# Altium PCB PCB_2-way_Traffic.PcbDoc
Units mil, origin at the board's own origin, x right, y up, seen from the top; angles counter-clockwise.
Board outline 2755.91 x 2244.09 mil, 2 copper layers (Top Layer, Bottom Layer); 17 components, 25 nets, 151 pads, 0 vias.
Unrouted connection lines stored in the file: 8.
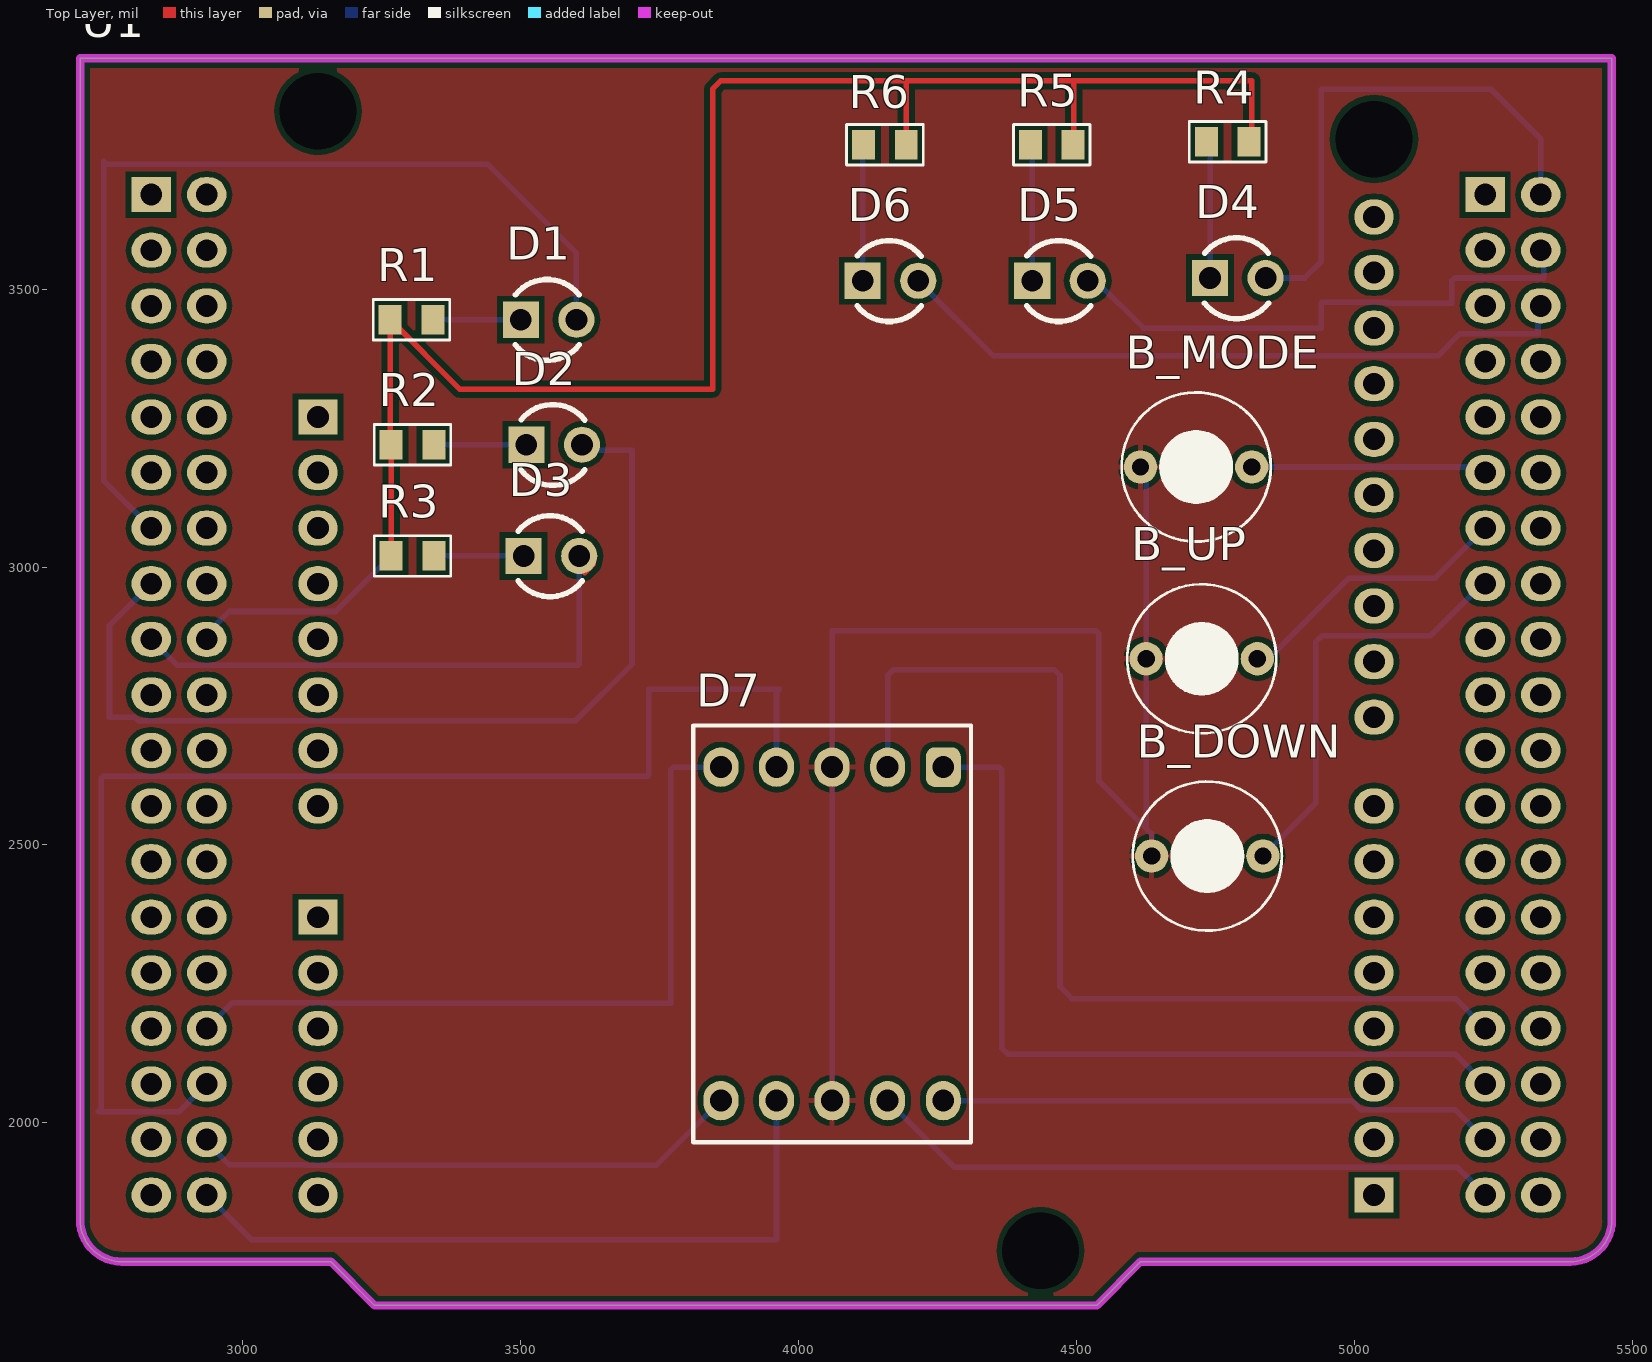
[diagram p0: Top Layer view]
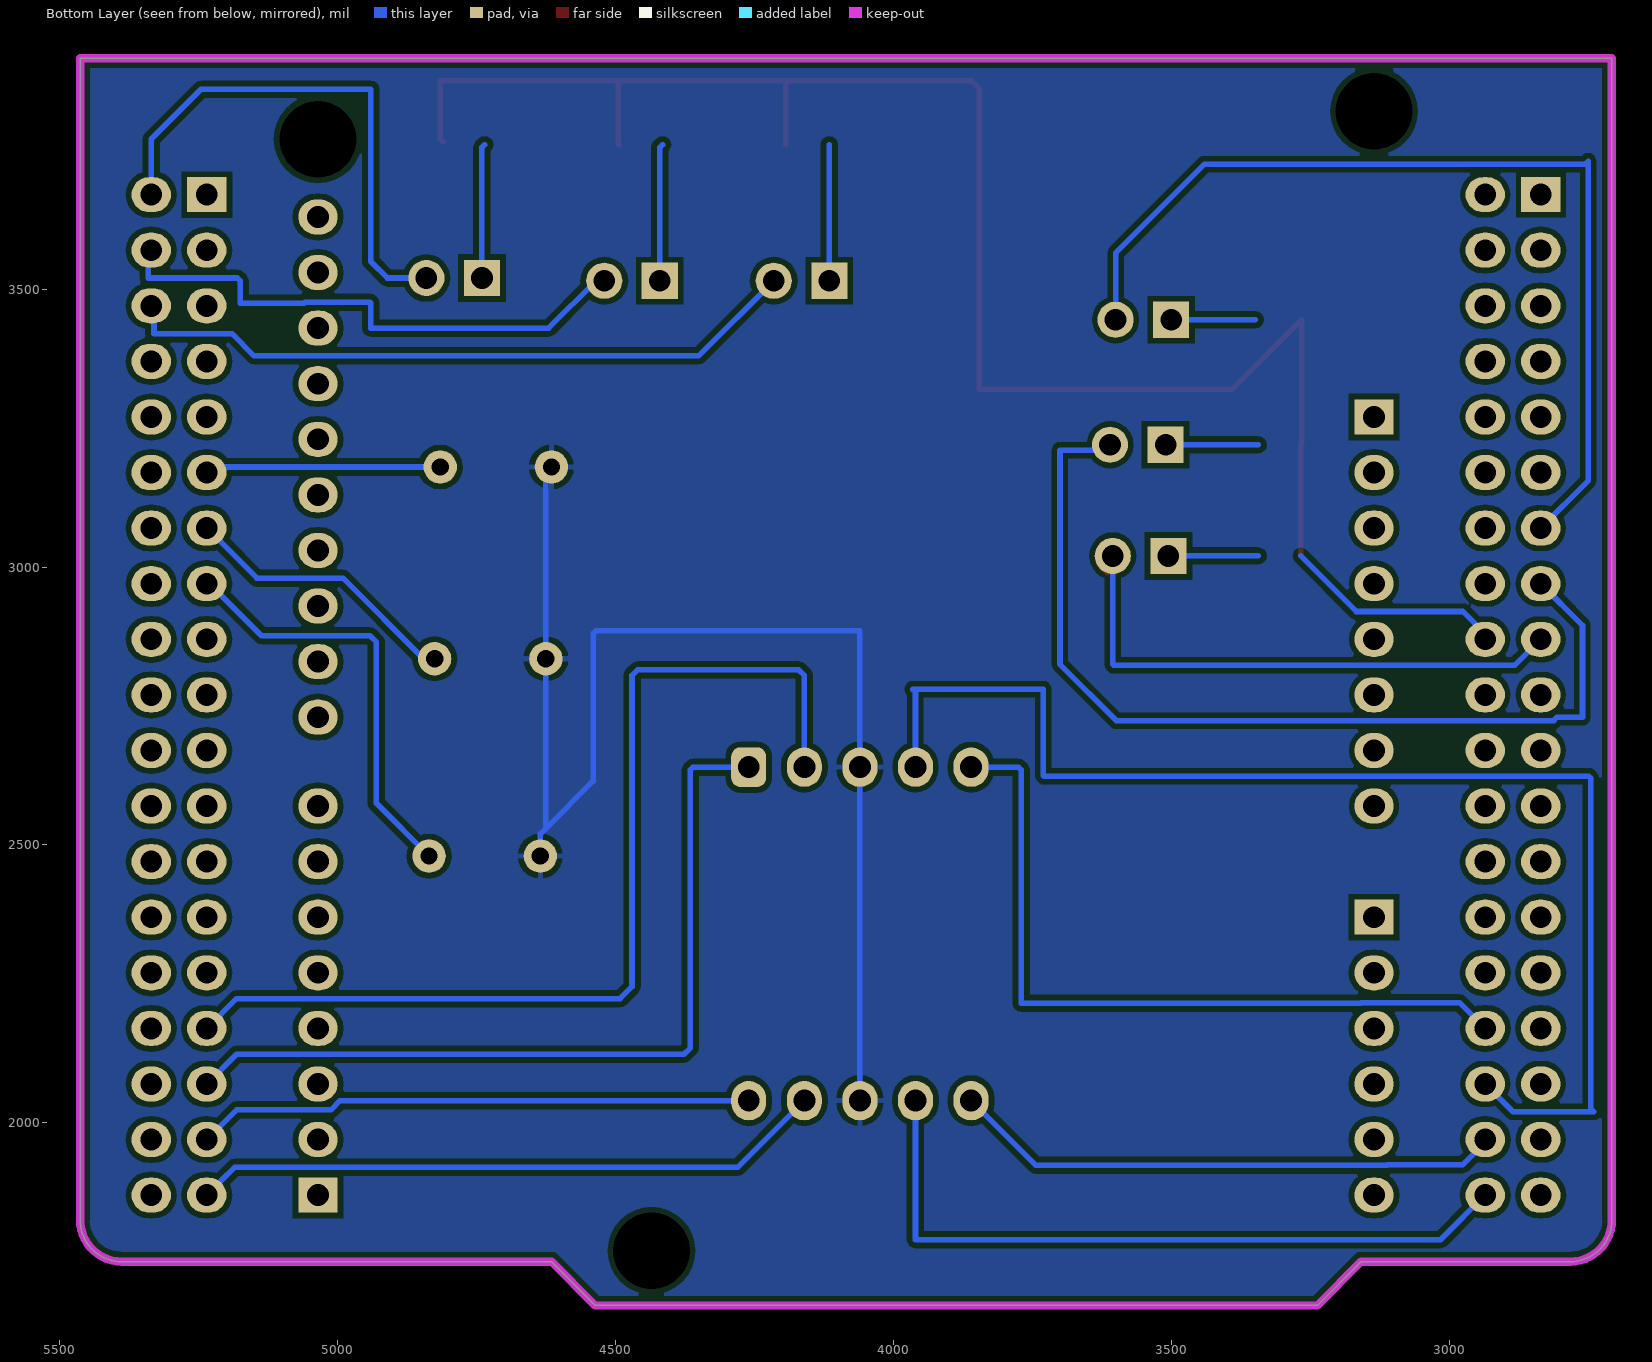
[diagram p1: Bottom Layer view, seen from below]
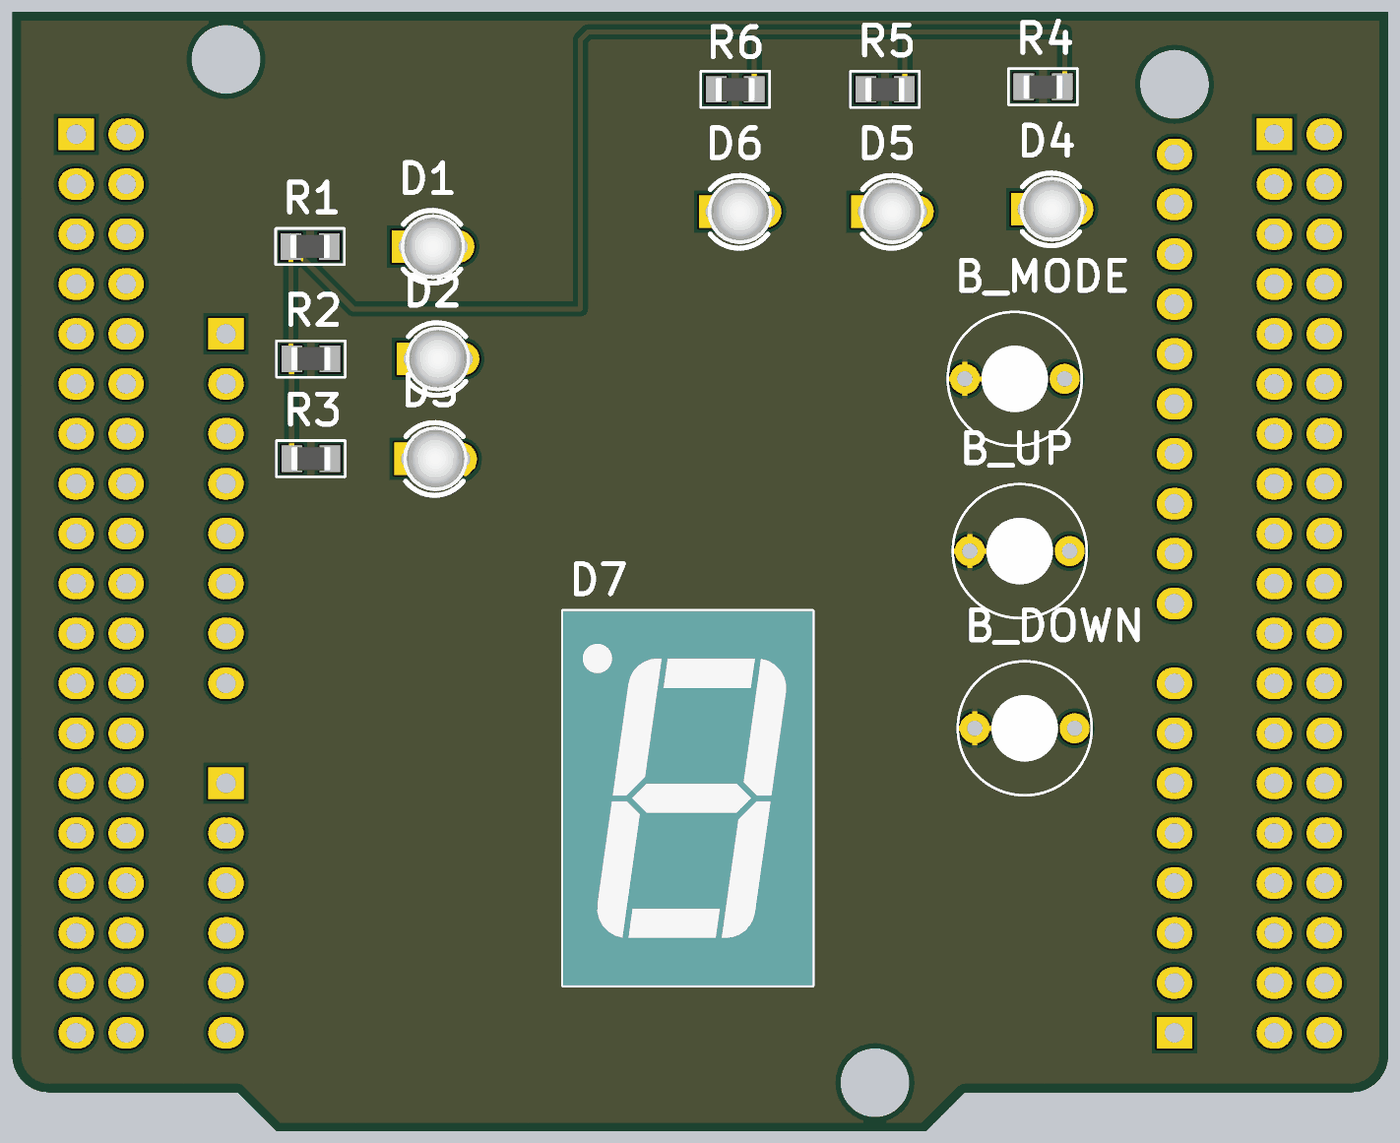
[diagram p2: 3D render of the assembled board from above, using the file's embedded part models]

## Layer stack, top to bottom
Top Solder: solder mask 0.4, Solder Resist, Dk 3.5
Top Layer: signal copper 1.4
Dielectric 1: dielectric 12.6, FR-4, Dk 4.8
Bottom Layer: signal copper 1.4
Bottom Solder: solder mask 0.4, Solder Resist, Dk 3.5

## Board outline
2707.05,1825.32 ccw(c2782.05,1825.32) 2782.05,1750.32 3158.23,1750.32 3236.97,1671.57 4536.18,1671.57 4614.92,1750.32 5387.95,1750.32 ccw(c5387.95,1825.32) 5462.95,1825.32 5462.95,3915.67 2707.05,3915.67

## Design rules (kind name [scope] priority, off if disabled: settings)
Clearance [All] p1: gap=10 ignorepadtopadclearanceinfootprint=FALSE
PolygonConnect [All] p1: connectstyle=Relief reliefconductorwidth=10 reliefentries=4 polygonreliefangle="90 Angle" airgapwidth=10
RoomDefinition SCH_2-way_Traffic [InComponentClass('SCH_2-way_Traffic')] p1: confinementstyle=ConfineIn formatcopy=TRUE lockcomponents=FALSE outline 7045,1060 13045,1060 13045,3945 7045,3945
RoutingVias [All] p1: holewidth=28 width=50 viastyle="Through Hole" minholewidth=28 minwidth=50 maxholewidth=28 maxwidth=50
SolderMaskExpansion [All] p1: expansion=4
Width [All] p1: maxlimit=10 minlimit=10 preferedwidth=10
30 further rules are at their usual default settings.

## Components (designator, comment, footprint, x,y, rotation, side; value= is the part's Value field where it differs from the comment)
B_DOWN "Button" SW/2/DIP 4735,2480 r180 top
B_MODE "Button" SW/2/DIP 4715,3180 r180 top
B_UP "Button" SW/2/DIP 4725,2835 r180 top
D1 "Led" "LED 3MM - red" 3550,3445 r0 top
D2 "Led" "LED 3MM - yellow" 3560,3220 r0 top
D3 "Led" "LED 3MM - green" 3555,3020 r0 top
D4 "Led" "LED 3MM - red" 4790,3520 r0 top
D5 "Led" "LED 3MM - yellow" 4470,3515 r0 top
D6 "Led" "LED 3MM - green" 4165,3515 r0 top
D7 "SM420563N" LED/7SEG/0.56 4260,2640 r180 top
R1 "R" "R 0805" 3303.39,3445 r180 top
R2 "R" "R 0805" 3305,3220 r180 top
R3 "R" "R 0805" 3305,3020 r180 top
R4 "R" "R 0805" 4771.61,3765 r0 top
R5 "R" "R 0805" 4455,3760 r0 top
R6 "R" "R 0805" 4155,3760 r0 top
U1 "NUCLEO-F103RB" NUCLEO 2707.05,1750.32 r0 top locked

## Footprints (in the part's own frame and the unit in brackets; to place one, negate y for a bottom-side part, rotate by r counter-clockwise, add the part's x,y. Pads: shape width x height; smd on the part's side, far side on the other; paste and mask are expansions set on the pad)
"LED 3MM - green" [mil]
  rect 65x65 hole 39: 1(-50,0)
  round 65 hole 39: 2(50,0)
  silkscreen extent -60,-73 55,72, body extent -66,-65 64,65, height 207
"LED 3MM - red" [mil]
  rect 65x65 hole 39: 1(-50,0)
  round 65 hole 39: 2(50,0)
  silkscreen extent -60,-73 55,72, body extent -66,-65 64,65, height 207
"LED 3MM - yellow" [mil]
  rect 65x65 hole 39: 1(-50,0)
  round 65 hole 39: 2(50,0)
  silkscreen extent -60,-73 55,72, body extent -66,-65 64,65, height 207
LED/7SEG/0.56 [mm]
  rrect50% 1.6x1.8 hole 1: 1(0,0)
  oval 1.6x1.8 hole 1: 2(2.54,0) 3(5.08,0) 4(7.62,0) 5(10.16,0) 6(10.16,15.24) 7(7.62,15.24) 8(5.08,15.24) 9(2.54,15.24) 10(0,15.24)
  silkscreen extent -1.27,-1.91 11.43,17.14, body extent -1.27,-1.91 11.43,17.14, height 8.03
NUCLEO [mm]
  oval 1.8x1.6 hole 1: A5_1(59.13,24.88) A5_2(59.13,27.42) A5_3(59.13,29.96) A5_4(59.13,32.5) A5_5(59.13,35.04) A5_6(59.13,37.58) A5_7(59.13,40.12) A5_8(59.13,42.66) A5_9(59.13,45.2) A5_10(59.13,47.74) A6_2(10.87,36.06) A6_3(10.87,33.52) A6_4(10.87,30.98) A6_5(10.87,28.44) A6_6(10.87,25.9) A6_7(10.87,23.36) A6_8(10.87,20.82) A8_2(10.87,13.2) A8_3(10.87,10.66) A8_4(10.87,8.12) A8_5(10.87,5.58) A8_6(10.87,3.04) A9_2(59.13,5.58) A9_3(59.13,8.12) A9_4(59.13,10.66) A9_5(59.13,13.2) A9_6(59.13,15.74) A9_7(59.13,18.28) A9_8(59.13,20.82) M7_2(5.79,48.76) M7_3(3.25,46.22) M7_4(5.79,46.22) M7_5(3.25,43.68) M7_6(5.79,43.68) M7_7(3.25,41.14) M7_8(5.79,41.14) M7_9(3.25,38.6) M7_10(5.79,38.6) M7_11(3.25,36.06) M7_12(5.79,36.06) M7_13(3.25,33.52) M7_14(5.79,33.52) M7_15(3.25,30.98) M7_16(5.79,30.98) M7_17(3.25,28.44) M7_18(5.79,28.44) M7_19(3.25,25.9) M7_20(5.79,25.9) M7_21(3.25,23.36) M7_22(5.79,23.36) M7_23(3.25,20.82) M7_24(5.79,20.82) M7_25(3.25,18.28) M7_26(5.79,18.28) M7_27(3.25,15.74) M7_28(5.79,15.74) M7_29(3.25,13.2) M7_30(5.79,13.2) M7_31(3.25,10.66) M7_32(5.79,10.66) M7_33(3.25,8.12) M7_34(5.79,8.12) M7_35(3.25,5.58) M7_36(5.79,5.58) M7_37(3.25,3.04) M7_38(5.79,3.04) M10_2(66.75,48.76) M10_3(64.21,46.22) M10_4(66.75,46.22) M10_5(64.21,43.68) M10_6(66.75,43.68) M10_7(64.21,41.14) M10_8(66.75,41.14) M10_9(64.21,38.6) M10_10(66.75,38.6) M10_11(64.21,36.06) M10_12(66.75,36.06) M10_13(64.21,33.52) M10_14(66.75,33.52) M10_15(64.21,30.98) M10_16(66.75,30.98) M10_17(64.21,28.44) M10_18(66.75,28.44) M10_19(64.21,25.9) M10_20(66.75,25.9) M10_21(64.21,23.36) M10_22(66.75,23.36) M10_23(64.21,20.82) M10_24(66.75,20.82) M10_25(64.21,18.28) M10_26(66.75,18.28) M10_27(64.21,15.74) M10_28(66.75,15.74) M10_29(64.21,13.2) M10_30(66.75,13.2) M10_31(64.21,10.66) M10_32(66.75,10.66) M10_33(64.21,8.12) M10_34(66.75,8.12) M10_35(64.21,5.58) M10_36(66.75,5.58) M10_37(64.21,3.04) M10_38(66.75,3.04)
  rect 1.8x1.6 hole 1: A6_1(10.87,38.6) A8_1(10.87,15.74) A9_1(59.13,3.04) M7_1(3.25,48.76) M10_1(64.21,48.76)
  round 0 hole 3.5 unplated: HOLD(10.87,52.57) HOLD(43.89,0.5) HOLD(59.13,51.3)
  Keep-Out Layer lines w0.381: 0,1.905 ccw(c1.905,1.905) 1.905,0 11.46,0 13.46,-2 46.46,-2 48.46,0 68.095,0 ccw(c68.095,1.905) 70,1.905 70,55 0,55 0,1.905
"R 0805" [mm] "Chip Resistor, 2-Leads, Body 2.0x1.3mm, IPC Medium Density"
  rect 1.05x1.35 smd: 1(-0.975,0) 2(0.975,0)
  silkscreen extent -1.75,-0.92 1.75,0.92, body extent -1,-0.61 1,0.59, height 0.5
SW/2/DIP [mil]
  round 60 / inner round 62 / far side round 60 hole 31: 1(-100,0) 2(100,0)
  silkscreen extent -134,-134 134,134, body extent -134,-134 135,135, height 150

## Part data
B_DOWN B_MODE B_UP: library part "SW SPST", "Tact switch 2 pin"
D1 D2 D3 D4 D5 D6: "Typical LED"
D7: library part "LED 7-SEG SM420563N", "SM420563N, Common-Cathode, LED 7-seg, RED, 0.56\","
R1 R2 R3 R4 R5 R6: library part Resistor, "Resistor"
U1: "STM32F103RB, mbed-Enabled Development Nucleo-64 STM32F1 ARM® Cortex®-M3 MCU 32-Bit Embedded Evaluation Board", Manufacturer=STMicroelectronics, BRAND=STMicroelectronics, Manufacturer Product Number=NUCLEO-F103RB, PART NO=NUCLEO-F103RB, STOCK CODE=497-14362-ND, SUPPLIER=digi-key, TYPE="EVAL BRD"

## Nets (pads, with @x,y where several pads share a name; then routed paths per layer and width w, separated by ;. In a path a pad name is that pad's centre, name@x,y a point inside that pad or via, vN(x,y) a via of type N, cw(c..) or ccw(c..) an arc to the next point about the centre after c; other vN are vias at no path point)
+5: R1.2 R2.2 R3.2 R4.2 R5.2 R6.2 U1.M7_18 | length 3317.4
  Top Layer w10: U1.M7_18 U1.M7_18@2935,2880 ; R3.2 R2.2 3265,3221.61 R1.2 3390,3320 3845,3320 3845,3860 3860,3875 4190,3875 ; R6.2 4193.39,3871.61 4190,3875 ; R5.2 4495,3761.61 4495,3875 ; R4.2 4815,3770 4815,3875 4495,3875 ; 4190,3875 4495,3875
  Bottom Layer w10: U1.M7_18@2935,2880 2975,2920 3166.61,2920 3266.61,3020
GND: B_DOWN.2 B_MODE.2 B_UP.2 D7.3 D7.8 | length 2420.6
  Bottom Layer w10: D7.8 D7.3 4060,2885 4535,2885 4540,2880 4540,2615 4625,2530 ; B_MODE.2 4625,3170 B_UP.2 4625,2530 ; B_DOWN.2 4635,2520 4625,2530
LED_GREEN: D3.2 U1.M7_17 | length 984.9
  Bottom Layer w10: U1.M7_17 2881.5,2823.5 3603.5,2823.5 3605,2825 D3.2
LED_GREEN1: D6.2 U1.M10_6 | length 1239.6
  Bottom Layer w10: D6.2 4350,3380 5150,3380 5190,3420 5330,3420 5330,3465 U1.M10_6
LED_RED: D1.2 U1.M7_13 | length 1728.6
  Bottom Layer w10: U1.M7_13 2750,3155 2750,3730 2755,3725 3440,3725 3600,3565 D1.2@3600,3450
LED_RED1: D4.2 U1.M10_2 | length 954.7
  Bottom Layer w10: D4.2 4910,3520 4940,3550 4940,3860 5245,3860 5335,3770 U1.M10_2
LED_YELLOW: D2.2 U1.M7_15 | length 1740
  Bottom Layer w10: U1.M7_15 2760,2895 2760,2729.84 2805.47,2729.84 2811.8,2723.5 3598.5,2723.5 3700,2825 3700,3210 3615,3210 D2.2@3605,3220
LED_YELLOW1: D5.2 U1.M10_4 | length 995.5
  Bottom Layer w10: D5.2 4535,3515 4620,3430 4940,3430 4940,3475 4941.34,3476.34 5058.2,3476.34 5059.53,3475 5175,3475 5175,3515 5180,3520 5340,3520 5340,3565 U1.M10_4
NetD1_1: D1.1 R1.1 | length 151.6
  Bottom Layer w10: 3348.39,3445 D1.1
NetD2_1: D2.1 R2.1 | length 166.6
  Bottom Layer w10: 3343.39,3220 D2.1
NetD3_1: D3.1 R3.1 | length 182.8
  Top Layer w10: 3615,2990 3630,3005
  Bottom Layer w10: 3343.39,3020 D3.1
NetD4_1: D4.1 R4.1 | length 242.1
  Bottom Layer w10: 4735,3760 4740,3755 D4.1
NetD5_1: D5.1 R5.1 | length 247.1
  Bottom Layer w10: 4415,3760 4420,3755 D5.1
NetD6_1: D6.1 R6.1 | length 245
  Bottom Layer w10: D6.1 4115,3760
PA2: D7.10 U1.M10_35 | length 1004
  Bottom Layer w10: D7.10 4995.31,2040 5011.8,2023.5 5181.5,2023.5 U1.M10_35
PA3: D7.9 U1.M10_37 | length 1110.1
  Bottom Layer w10: D7.9 4280,1920 5185,1920 5210,1895
PA4: D7.5 U1.M7_32 | length 1367
  Bottom Layer w10: U1.M7_32 2981.5,2216.5 3158.2,2216.5 3159.69,2215 3770,2215 3770,2635 3775,2640 D7.5
PA5: B_MODE.1 U1.M10_11 | length 424.1
  Bottom Layer w10: B_MODE.1 5225,3180 U1.M10_11
PA6: B_UP.1 U1.M10_13 | length 507.3
  Bottom Layer w10: B_UP.1 4845,2835 4990,2980 5145,2980 U1.M10_13
PA7: B_DOWN.1 U1.M10_15 | length 772.8
  Bottom Layer w10: B_DOWN.1 4930,2575 4930,2865 4941.34,2876.34 5136.34,2876.34 5230,2970 U1.M10_15
PA10: D7.1 U1.M10_33 | length 1504
  Bottom Layer w10: D7.1 4360,2640 4365,2635 4365,2135 4376.5,2123.5 5181.5,2123.5 U1.M10_33
PB0: D7.4 U1.M7_34 | length 2336.9
  Bottom Layer w10: U1.M7_34 2885,2020 2740,2020 2745,2025 2745,2620 2748.5,2623.5 3728.5,2623.5 3730,2625 3730,2780 3965,2780 3960,2775 D7.4
PB3: D7.2 U1.M10_31 | length 1839.4
  Bottom Layer w10: D7.2 4160,2805 4170,2815 4460,2815 4470,2805 4470,2245 4491.5,2223.5 5181.5,2223.5 U1.M10_31
PC0: D7.7 U1.M7_38 | length 1308.1
  Bottom Layer w10: U1.M7_38 3015,1790 3960,1790 D7.7
PC1: D7.6 U1.M7_36 | length 995.4
  Bottom Layer w10: U1.M7_36 2935,1965 2975,1925 3110.31,1925 3111.8,1923.5 3743.5,1923.5 D7.6
pads on no net: U1.A5_1 U1.A5_2 U1.A5_3 U1.A5_4 U1.A5_5 U1.A5_6 U1.A5_7 U1.A5_8 U1.A5_9 U1.A5_10 U1.A6_1 U1.A6_2 U1.A6_3 U1.A6_4 U1.A6_5 U1.A6_6 U1.A6_7 U1.A6_8 U1.A8_1 U1.A8_2 U1.A8_3 U1.A8_4 U1.A8_5 U1.A8_6 U1.A9_1 U1.A9_2 U1.A9_3 U1.A9_4 U1.A9_5 U1.A9_6 U1.A9_7 U1.A9_8 U1.HOLD U1.M7_1 U1.M7_2 U1.M7_3 U1.M7_4 U1.M7_5 U1.M7_6 U1.M7_7 U1.M7_8 U1.M7_9 U1.M7_10 U1.M7_11 U1.M7_12 U1.M7_14 U1.M7_16 U1.M7_19 U1.M7_20 U1.M7_21 U1.M7_22 U1.M7_23 U1.M7_24 U1.M7_25 U1.M7_26 U1.M7_27 U1.M7_28 U1.M7_29 U1.M7_30 U1.M7_31 U1.M7_33 U1.M7_35 U1.M7_37 U1.M10_1 U1.M10_3 U1.M10_5 U1.M10_7 U1.M10_8 U1.M10_9 U1.M10_10 U1.M10_12 U1.M10_14 U1.M10_16 U1.M10_17 U1.M10_18 U1.M10_19 U1.M10_20 U1.M10_21 U1.M10_22 U1.M10_23 U1.M10_24 U1.M10_25 U1.M10_26 U1.M10_27 U1.M10_28 U1.M10_29 U1.M10_30 U1.M10_32 U1.M10_34 U1.M10_36 U1.M10_38

## Polygon pours and split planes (outlines as drawn)
GND on Bottom Layer "GND_L02_P000" (solid, remove dead copper, pour order 0): 2707.05,3915.67 5455,3915.67 5455,1785 5420.31,1750.32 4614.92,1750.32 4614.92,1750.31 4536.18,1671.57 4529.21,1678.54 3230,1678.54 3158.23,1750.32 2754.68,1750.32 2705,1800 2707.05,1802.05
GND on Top Layer "GND_L01_P002" (solid, remove dead copper, pour order 2): 2707.05,3915.67 5462.95,3915.67 5462.95,1788.27 5425,1750.32 4614.92,1750.32 4614.92,1750.31 4536.18,1671.57 3236.97,1671.57 3158.23,1750.32 2749.68,1750.32 2707.05,1792.95